# Altium PCB GAT562 30S Mesh Module封装.PcbDoc
Units mm, origin at the board's own origin, x right, y up, seen from the top; angles counter-clockwise.
Board outline 35 x 35 mm, 2 copper layers (Top Layer, Bottom Layer), stack 0.863 mm thick; 1 components, 74 nets, 40 pads, 0 vias.
Unrouted connection lines stored in the file: 3.
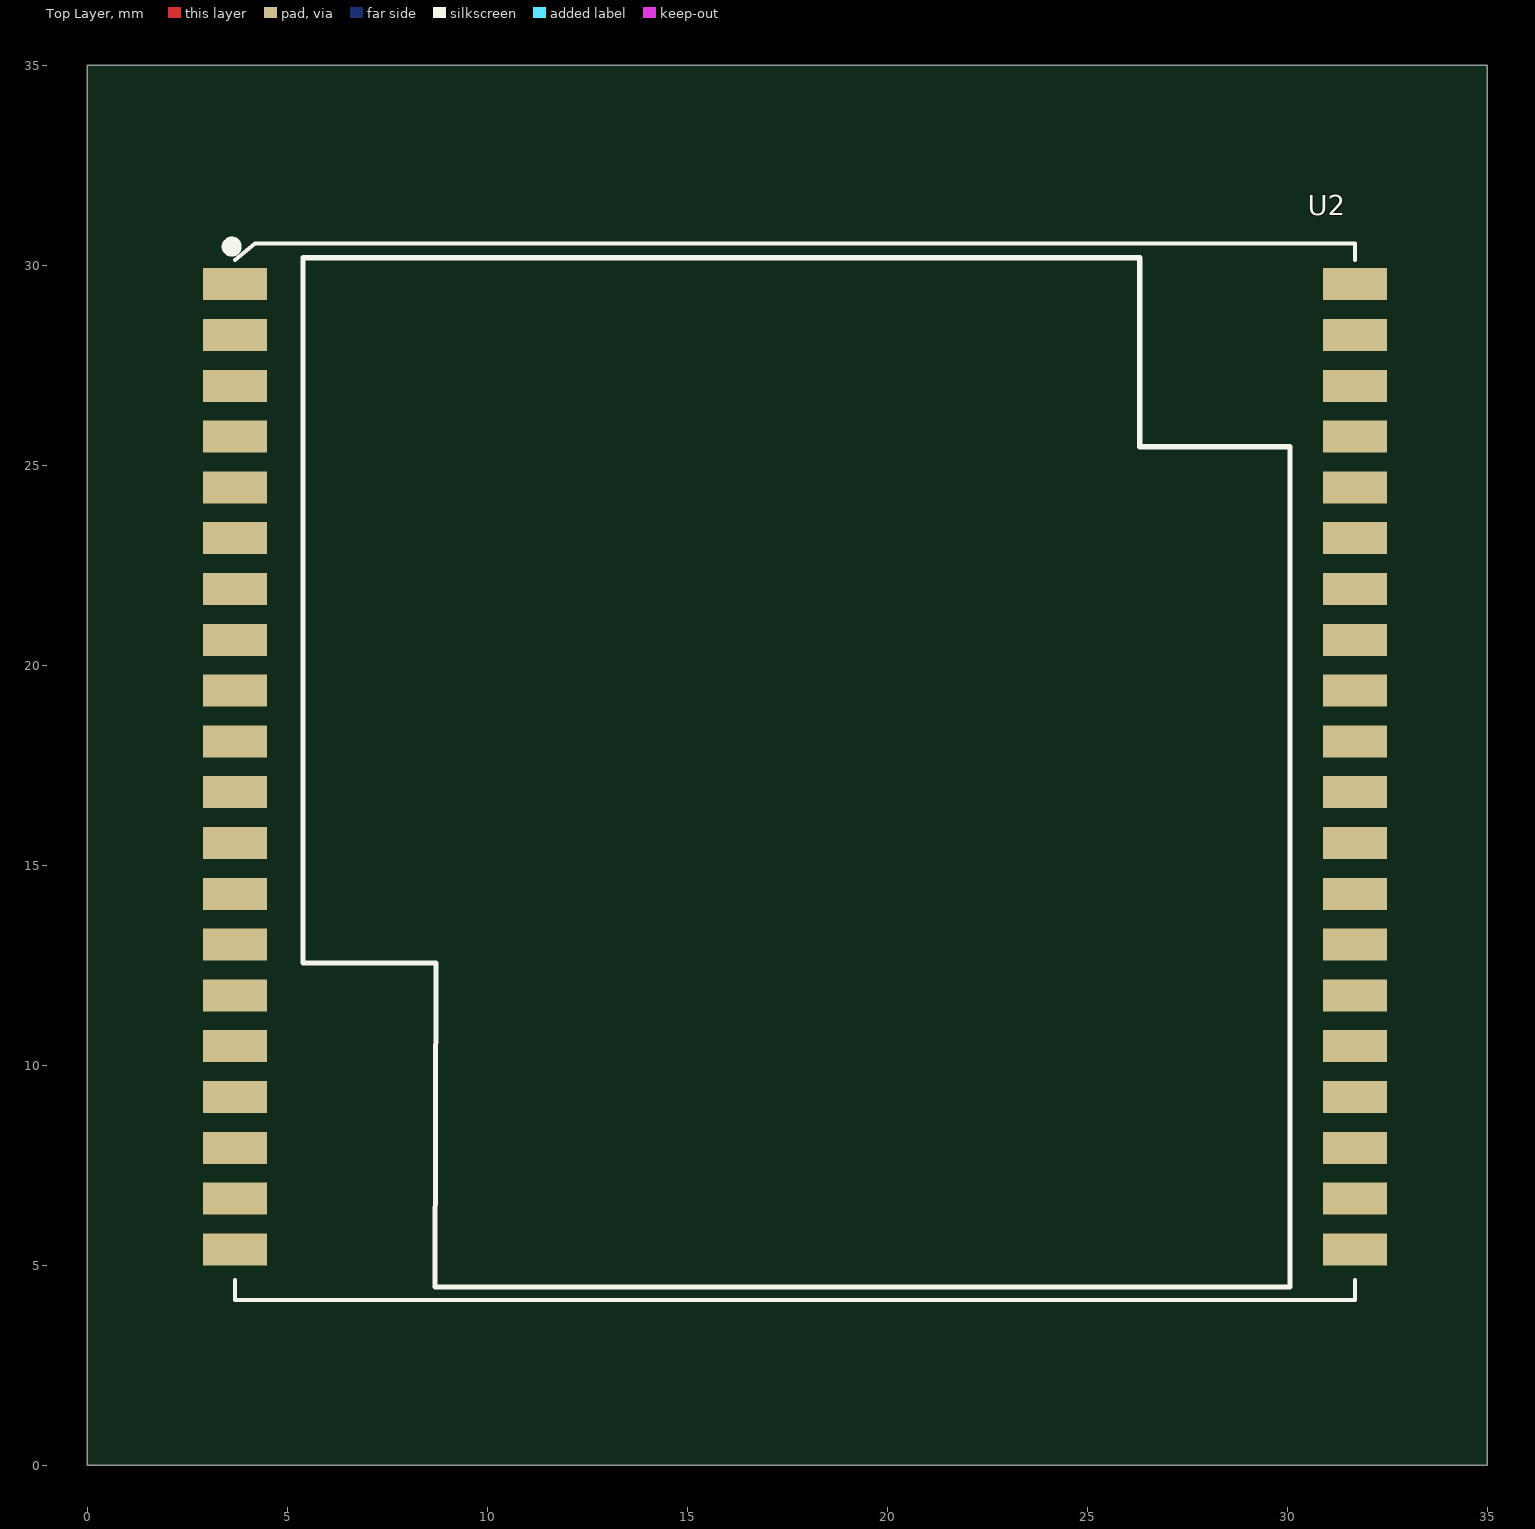
[diagram p0: Top Layer view]
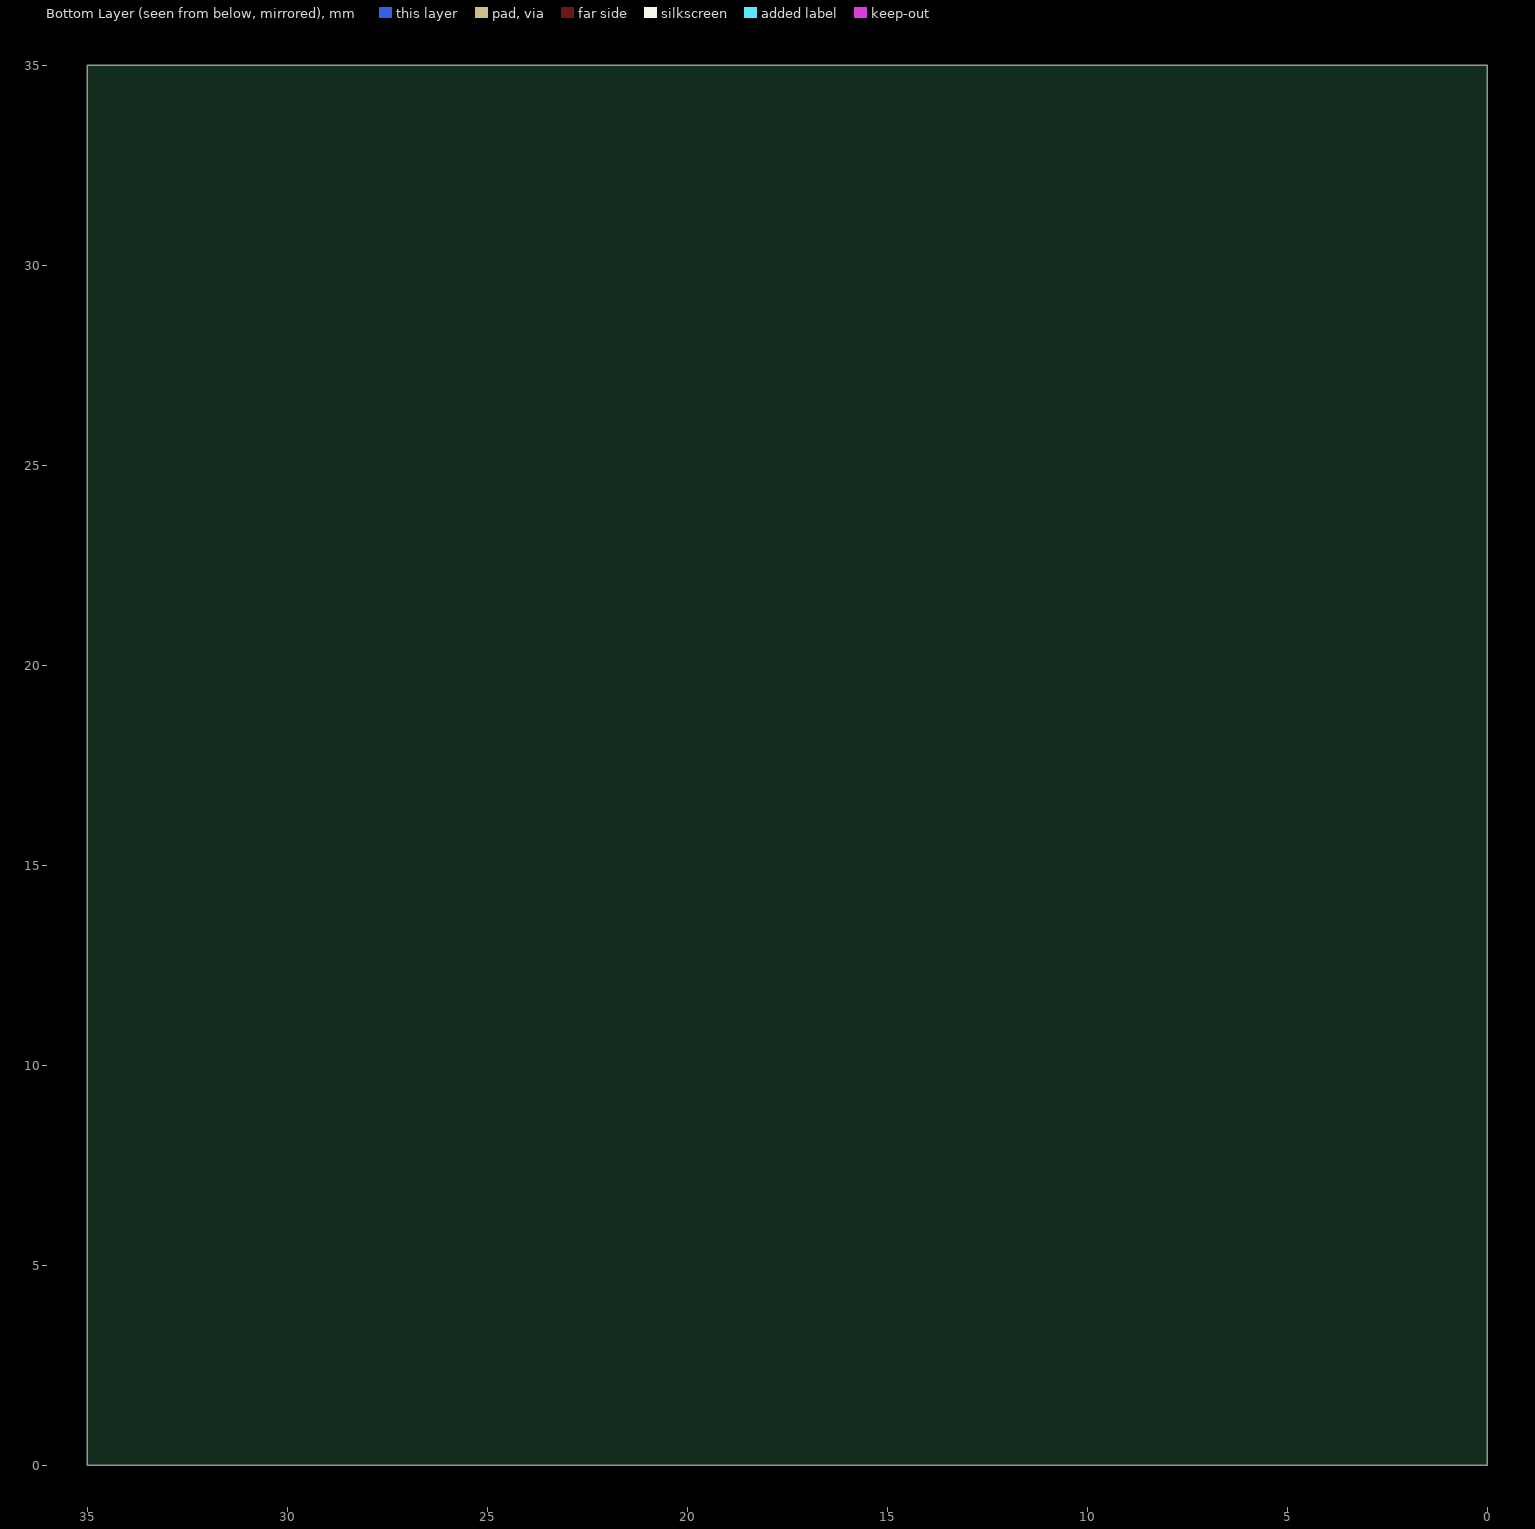
[diagram p1: Bottom Layer view, seen from below]

## Layer stack, top to bottom
Top Solder: solder mask 0.0102, Solder Resist, Dk 3.5
Top Layer: signal copper 0.0175
Dielectric 3: prepreg 0.1679, PP-006, Dk 4.1
Dielectric 1: dielectric 0.4925, FR-4, Dk 4.8
Dielectric 2: prepreg 0.1679, PP-006, Dk 4.1
Bottom Layer: signal copper 0.0175
Bottom Solder: solder mask 0.0102, Solder Resist, Dk 3.5

## Board outline
0,0 0,35 35,35 35,0

## Design rules (kind name [scope] priority, off if disabled: settings)
Clearance [All] p1: gap=0.152 ignorepadtopadclearanceinfootprint=FALSE
ComponentClearance [All] p1: gap=0.051 collisioncheckmode=3 verticalgap=0.254 showdistances=FALSE
DiffPairsRouting JLC_4LOR6L_2313_DiffPair_100OM [InDifferentialPairClass('JLC_4LOR6L_2313_100OM')] p1 off: maxlimit=0.203 minlimit=0.203 mostfreqgap=0.203 toplayer_minwidth=0.381 toplayer_maxwidth=0.381 toplayer_prefwidth=0.381 bottomlayer_minwidth=0.381 bottomlayer_maxwidth=0.381 bottomlayer_prefwidth=0.381 maxuncoupledlength=12.7
DiffPairsRouting JLC_4LOR6L_2313_DiffPair_90OM [InDifferentialPairClass('JLC_4LOR6L_2313_90OM')] p2: maxlimit=0.203 minlimit=0.203 mostfreqgap=0.203 toplayer_minwidth=0.153 toplayer_maxwidth=0.153 toplayer_prefwidth=0.153 bottomlayer_minwidth=0.153 bottomlayer_maxwidth=0.153 bottomlayer_prefwidth=0.153 maxuncoupledlength=12.7
DiffPairsRouting [All] p3 off: maxlimit=0.254 minlimit=0.254 mostfreqgap=0.254 toplayer_minwidth=0.381 toplayer_maxwidth=0.381 toplayer_prefwidth=0.381 bottomlayer_minwidth=0.381 bottomlayer_maxwidth=0.381 bottomlayer_prefwidth=0.381 maxuncoupledlength=12.7
MatchedLengths ALL [All] p1: tolerance=0.127 checknetsindiffpair=TRUE checkdiffpairvsdiffpair=FALSE checkxsignals=FALSE checkothers=FALSE
PlaneClearance [All] p1: clearance=0.203
PlaneConnect [All] p1: planeconnectstyle=Direct reliefexpansion=0.508 reliefentries=4 reliefconductorwidth=0.254 reliefairgap=0.254
PolygonConnect PWR_20mil [InNetClass('PWR')] p1: connectstyle=Direct reliefconductorwidth=0.508 reliefentries=4 polygonreliefangle="90 Angle" airgapwidth=0.254
PolygonConnect DIP_RELIEF--10MIL [(InComponentClass('Top Side Components')) and  (OnLayer('Multi-Layer'))] p2: connectstyle=Direct reliefconductorwidth=0.254 reliefentries=4 polygonreliefangle="90 Angle" airgapwidth=0.254
PolygonConnect ALL_FULL [All] p3: connectstyle=Direct reliefconductorwidth=0.254 reliefentries=4 polygonreliefangle="90 Angle" airgapwidth=0.254
RoutingVias VIA12MIL [All] p1: holewidth=0.305 width=0.61 viastyle="Through Hole" minholewidth=0.2 minwidth=0.4 maxholewidth=0.305 maxwidth=0.61
RoutingVias VIA7.874 [All] p2 off: holewidth=0.2 width=0.4 viastyle="Through Hole" minholewidth=0.2 minwidth=0.4 maxholewidth=0.2 maxwidth=0.4
RoutingVias VIA8MIL [All] p3 off: holewidth=0.203 width=0.406 viastyle="Through Hole" minholewidth=0.203 minwidth=0.406 maxholewidth=0.203 maxwidth=0.406
RoutingVias VIA10MIL [All] p4 off: holewidth=0.254 width=0.508 viastyle="Through Hole" minholewidth=0.254 minwidth=0.508 maxholewidth=0.254 maxwidth=0.508
SilkToSilkClearance [All vs OnLayer('Keep-Out Layer')] p1: silktosilkclearance=2.032
SilkToSolderMaskClearance SilkscreenOverComponentPads [IsPad] p1: minsilkscreentomaskgap=0.003 clearancetoexposedcopper=TRUE
SolderMaskExpansion [All] p1: expansion=0.064 istentingtop=FALSE
UnRoutedNet [All] p1: checkbadconnections=TRUE
Width [All] p1: maxlimit=0.762 minlimit=0.152 preferedwidth=0.152
Width PWR--10mil [InNetClass('PWR')] p2 off: maxlimit=2.54 minlimit=0.152 preferedwidth=0.508
Width ANT-20mil [InNetClass('ANT')] p3 off: maxlimit=0.508 minlimit=0.508 preferedwidth=0.508
Width Width-6mil [All] p4 off: maxlimit=0.203 minlimit=0.102 preferedwidth=0.152
Width JLC_4LOR6L_2313_DiffPair_100OM_width [InDifferentialPairClass('JLC_4LOR6L_2313_100OM')] p5 off: maxlimit=0.122 minlimit=0.122 preferedwidth=0.122
Width JLC_4LOR6L_2313_DiffPair_90OM_width [InDifferentialPairClass('JLC_4LOR6L_2313_90OM')] p6 off: maxlimit=0.153 minlimit=0.153 preferedwidth=0.153
Width JLC_4LOR6L_2313_DiffPair_50OM_width [InNetClass('JLC_4LOR6L_2313_50OM')] p7 off: maxlimit=0.147 minlimit=0.147 preferedwidth=0.147
23 further rules are at their usual default settings.

## Classes and differential pairs
differential pair USB: +USB_P -USB_N

## Components (designator, comment, footprint, x,y, rotation, side; value= is the part's Value field where it differs from the comment)
U2 "gat562 30s" "gat562 30s" 3.687,29.528 r0 top

## Footprints (in the part's own frame and the unit in brackets; to place one, negate y for a bottom-side part, rotate by r counter-clockwise, add the part's x,y. Pads: shape width x height; smd on the part's side, far side on the other; paste and mask are expansions set on the pad)
"gat562 30s" [mm]
  rect 1.6x0.8 smd: 1(0,0) 2(0,-1.27) 3(0,-2.54) 4(0,-3.81) 5(0,-5.08) 6(0,-6.35) 7(0,-7.62) 8(0,-8.89) 9(0,-10.16) 10(0,-11.43) 11(0,-12.7) 12(0,-13.97) 13(0,-15.24) 14(0,-16.51) 15(0,-17.78) 16(0,-19.05) 17(0,-20.32) 18(0,-21.59) 19(0,-22.86) 20(0,-24.13) 21(28,-24.13) 22(28,-22.86) 23(28,-21.59) 24(28,-20.32) 25(28,-19.05) 26(28,-17.78) 27(28,-16.51) 28(28,-15.24) 29(28,-13.97) 30(28,-12.7) 31(28,-11.43) 32(28,-10.16) 33(28,-8.89) 34(28,-7.62) 35(28,-6.35) 36(28,-5.08) 37(28,-3.81) 38(28,-2.54) 39(28,-1.27) 40(28,0)
  Multi-Layer pour cut-out: 2.007,-22.225 2.007,-24.613 4.267,-24.613 4.267,-22.174 2.108,-22.174 2.057,-22.225
  Multi-Layer pour cut-out: 24.072,0.991 24.072,-1.397 26.332,-1.397 26.332,1.041 24.173,1.041 24.122,0.991
  silkscreen extent -0.18,-25.39 28,1.04, body extent 0.83,-25.21 26.66,1.07, height 2.8

## Nets (pads, with @x,y where several pads share a name; then routed paths per layer and width w, separated by ;. In a path a pad name is that pad's centre, name@x,y a point inside that pad or via, vN(x,y) a via of type N, cw(c..) or ccw(c..) an arc to the next point about the centre after c; other vN are vias at no path point)
3V3: 
3V3_GPS: 
3V3_SX: U2.21
ADC_VBAT: U2.36
BAT_NRF: U2.5
BEE_EN: U2.24
DOWN: U2.37
GND: U2.4 U2.8 U2.14 U2.39
I2C_SCL: U2.7
I2C_SCL2: U2.23
I2C_SDA: U2.6
I2C_SDA2: U2.22
IO2: U2.25
LED1: U2.26
LED2: U2.27
LEFT: U2.34
NetANT1_1: 
NetBU1_2: 
NetC3_1: 
NetC13_1: 
NetC14_1: 
NetC16_2: 
NetC21_1: 
NetCON1_A5: 
NetCON1_B5: 
NetD6_2: 
NetD8_1: 
NetLED1_1: 
NetLED1_2: 
NetLED2_1: 
NetLED2_2: 
NetLED3_1: 
NetLED3_2: 
NetLED4_1: 
NetLED4_2: 
NetLED5_1: 
NetLED5_4: 
NetQ3_1: 
NetQ4_1: 
NetR2_1: 
NetR8_2: 
NetR21_2: 
NetR22_2: 
NetR23_2: 
NetR24_1: 
NetR25_1: 
NetR26_2: 
NetR38_2: 
NetR39_1: 
NFC2: U2.29
NRF_RST: U2.12
QSPI_CLK: U2.30
QSPI_DIO3: U2.31
RIGHT: U2.33
SC: U2.38
SWDCLK: U2.19
SWDIO: U2.18
U_KEY: U2.28
UART1_DE: U2.17
UART1_RX: U2.16
UART1_TX: U2.15
UART2_DE: U2.11
UART2_RX: U2.9
UART2_TX: U2.10
UP: U2.35
USB_N: U2.2
USB_P: U2.3
VBAT: 
VBAT_S: 
VBUS: U2.1
VCC5V: U2.20
VDD33: 
VDD_NRF: U2.13
WS2812: U2.32
pads on no net: U2.40

## Silkscreen, mask and mechanical layers (free items; w line width, h text height)
Mechanical 1:
  the board outline again, w0.013
Mechanical 14:
  drawing of 2252 lines, arcs and shapes, not listed